# Altium PCB POW_PCB.PcbDoc
Units mm, origin at the board's own origin, x right, y up, seen from the top; angles counter-clockwise.
Board outline 100 x 100 mm, 2 copper layers (Top Layer, Bottom Layer), stack 1.67 mm thick; 55 components, 32 nets, 137 pads, 5 vias.
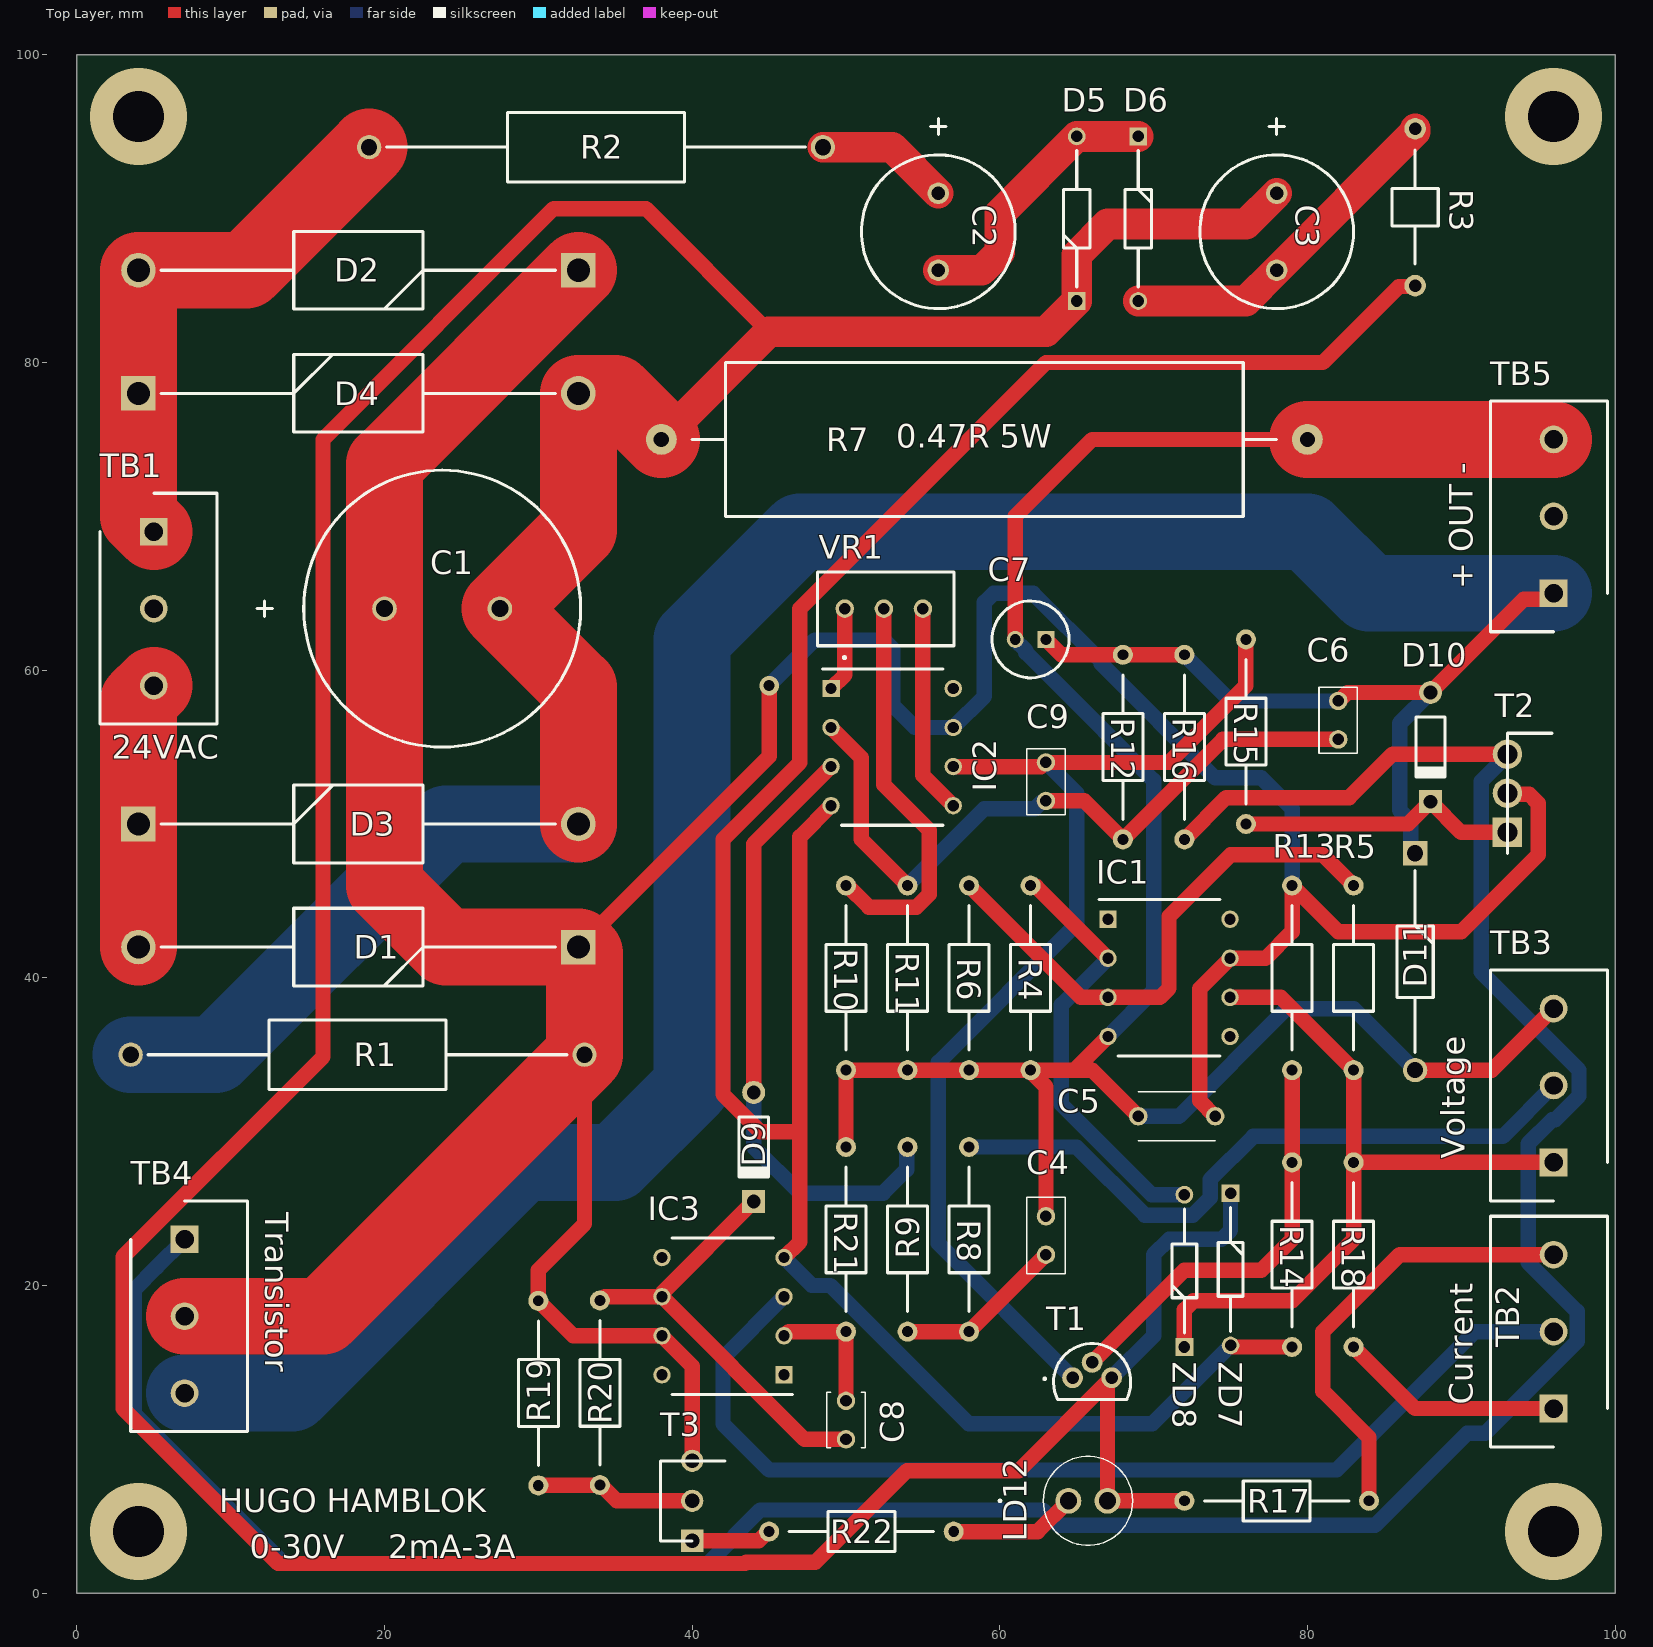
[diagram p0: Top Layer view]
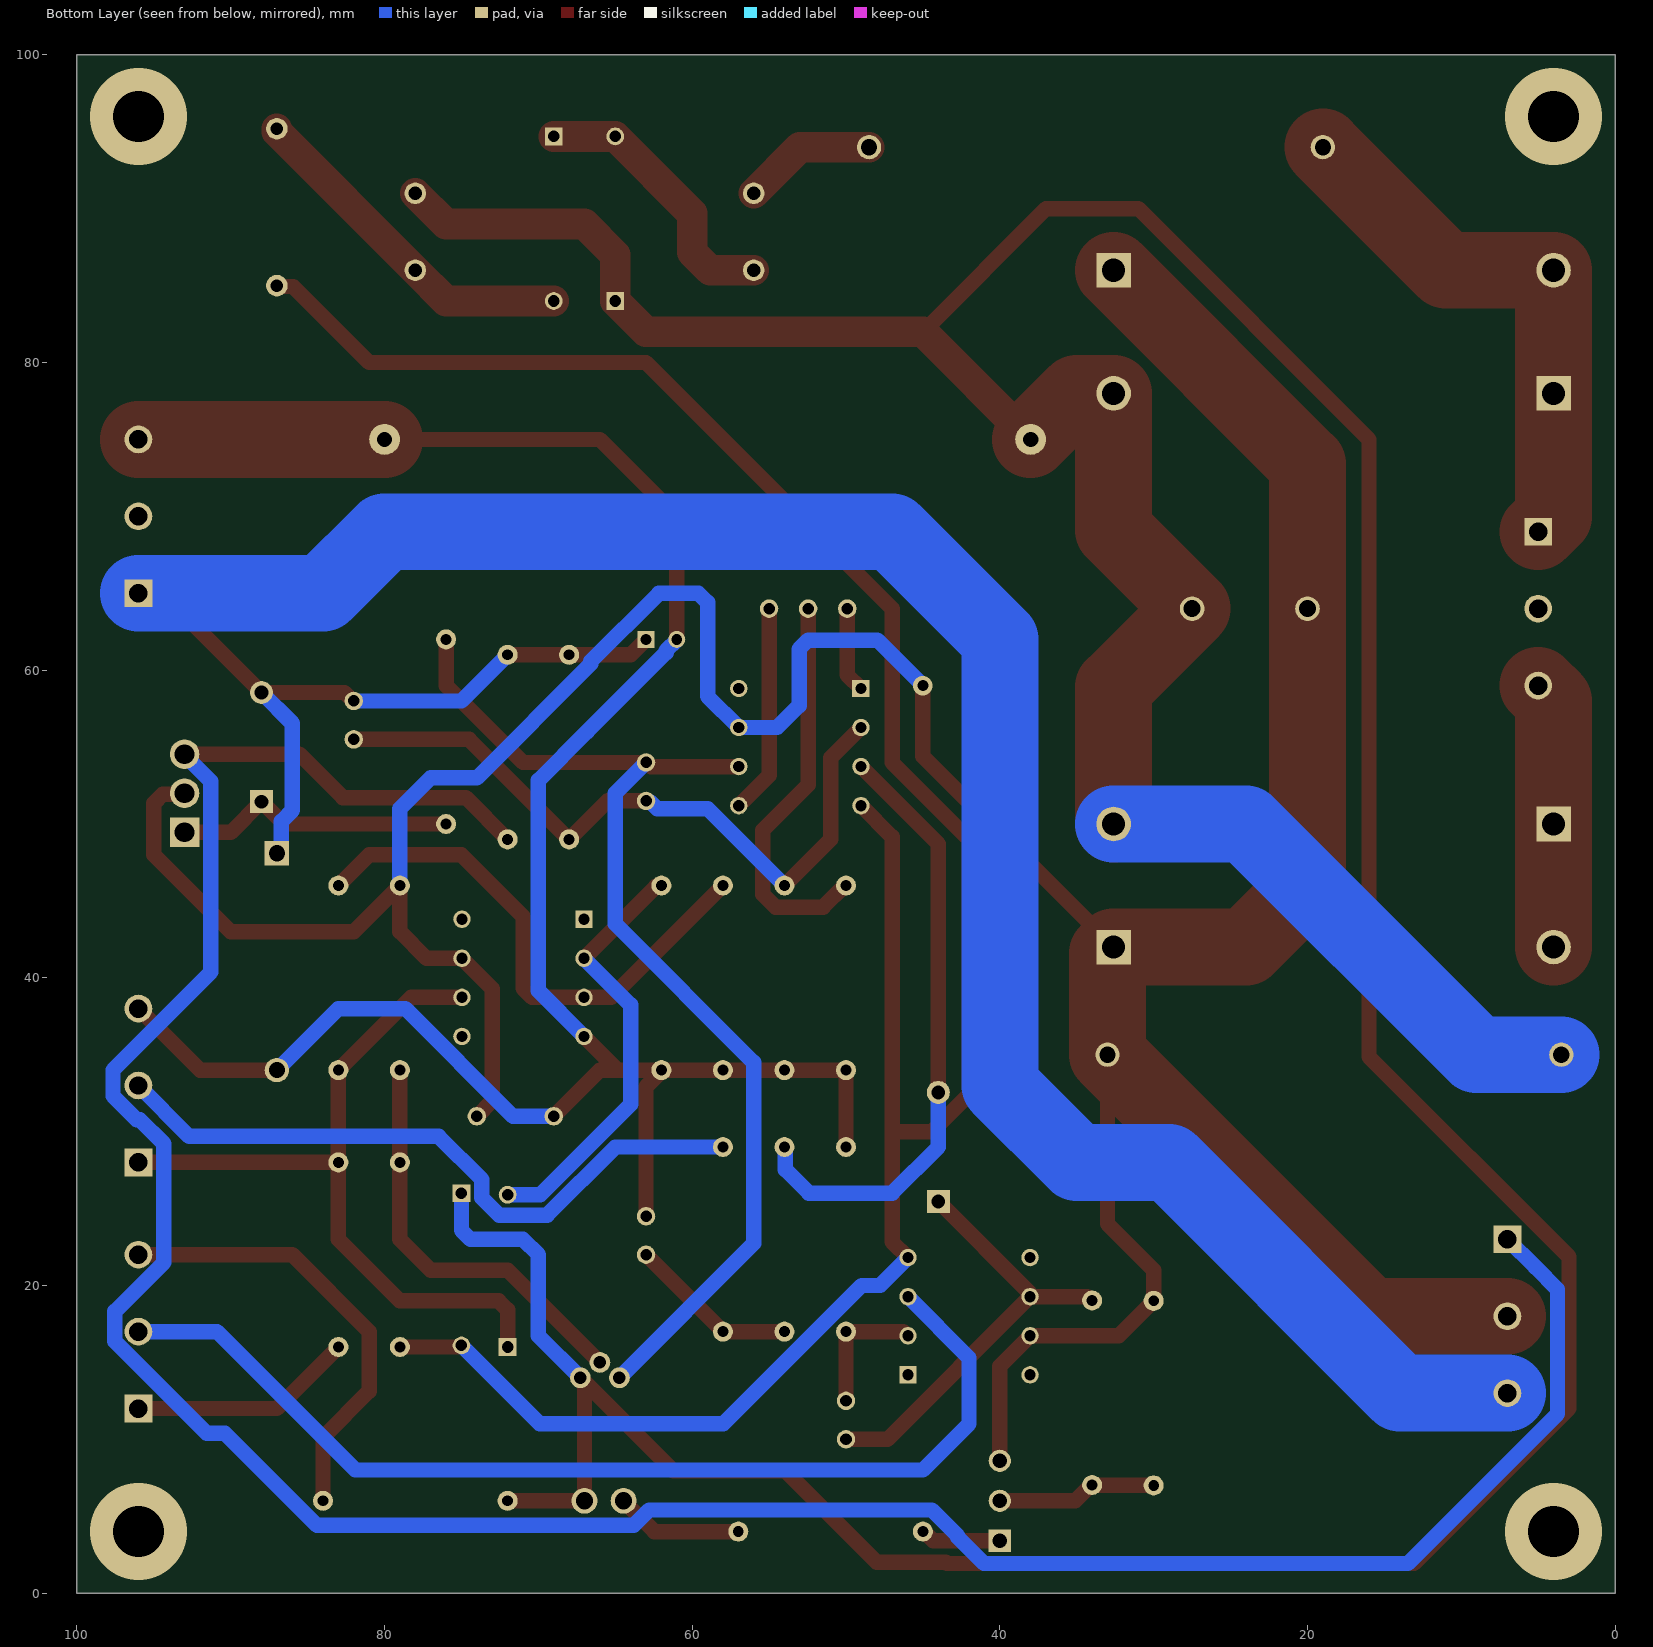
[diagram p1: Bottom Layer view, seen from below]
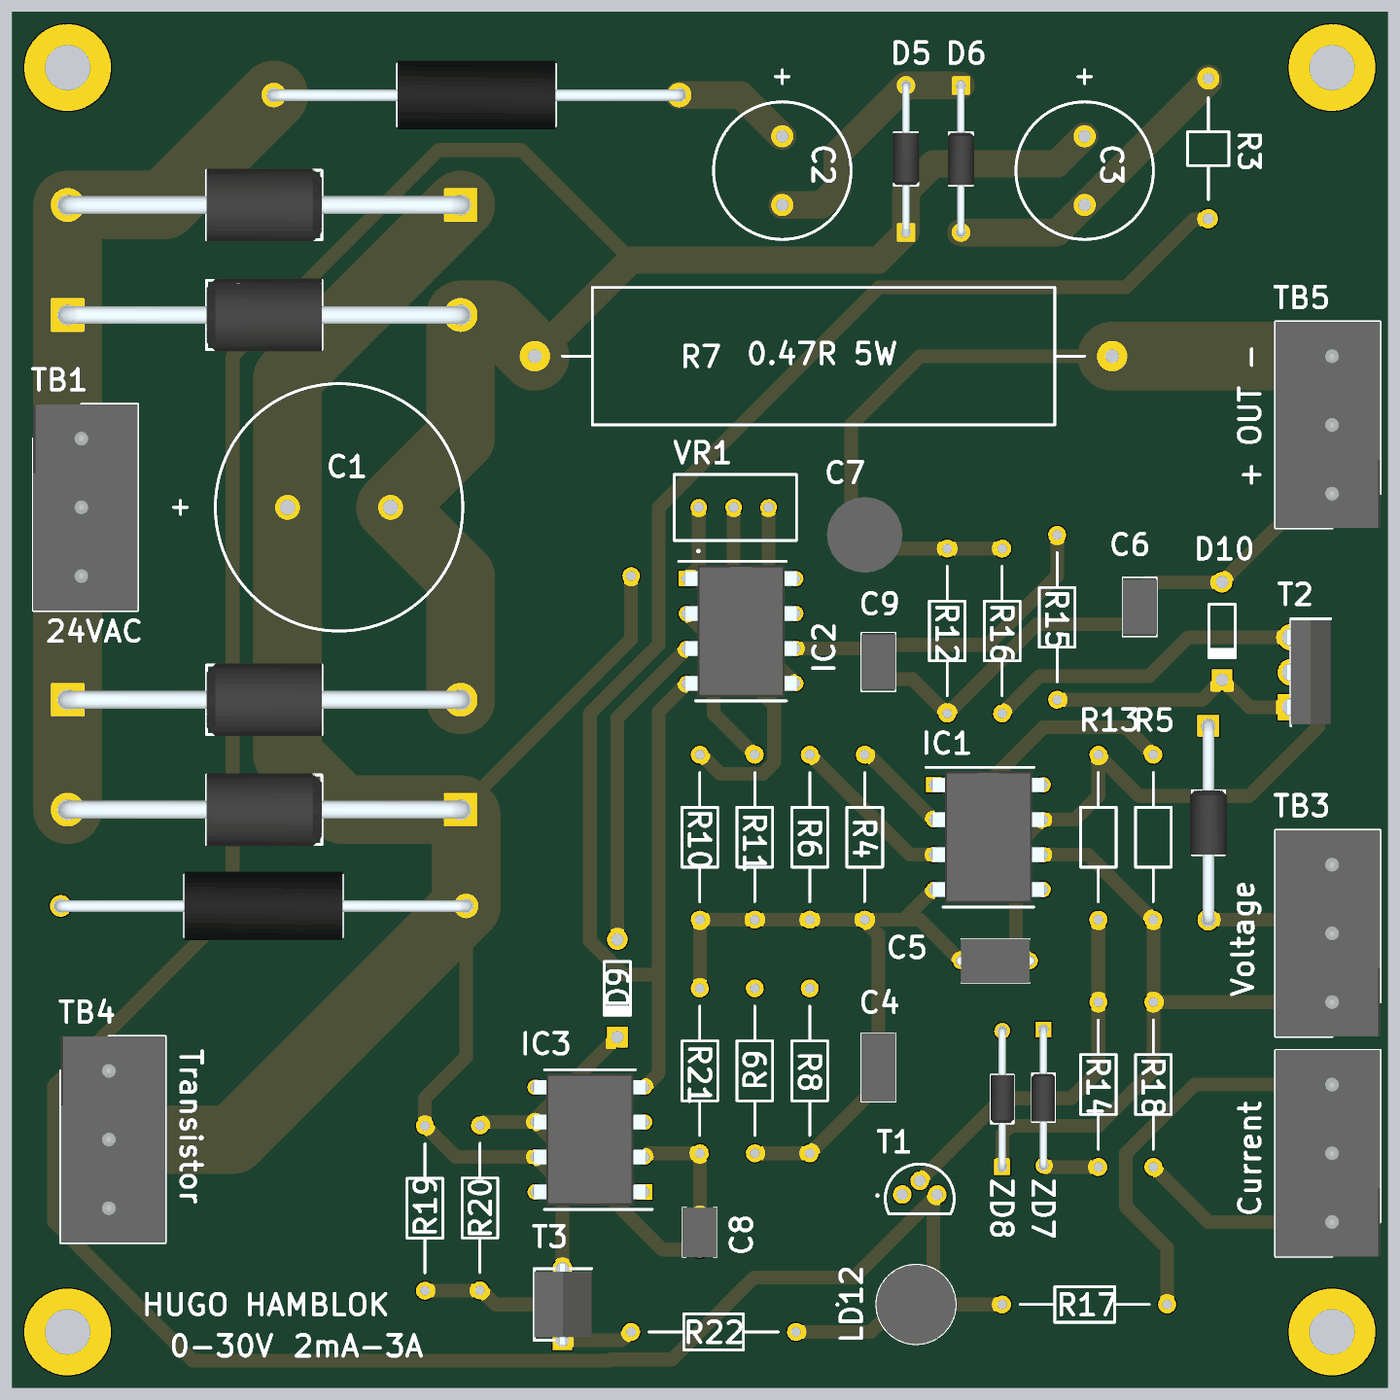
[diagram p2: 3D render of the assembled board from above, using the file's embedded part models]

## Layer stack, top to bottom
Top Solder: solder mask 0.0102, Solder Resist, Dk 3.5
Top Layer: signal copper 0.035
Dielectric 1: dielectric 1.6, FR-4, Dk 4.8
Bottom Layer: signal copper 0.035
Bottom Solder: solder mask 0.0102, Solder Resist, Dk 3.5

## Board outline
0,0 100,0 100,100 0,100

## Design rules (kind name [scope] priority, off if disabled: settings)
BoardOutlineClearance [All] p1: gap=0.2 ignorepadtopadclearanceinfootprint=FALSE
Clearance [All] p1: gap=0.127 ignorepadtopadclearanceinfootprint=FALSE
HoleSize [All] p1: absolutevalues=TRUE maxlimit=6.3 minlimit=0.2 maxpercent=80.000 minpercent=20.000
HoleToHoleClearance [All] p1: gap=0.127 allowstackedmicrovias=TRUE
MinimumSolderMaskSliver [All] p1: minsoldermaskwidth=0.127
PolygonConnect [All] p1: connectstyle=Relief reliefconductorwidth=0.254 reliefentries=4 polygonreliefangle="90 Angle" airgapwidth=0.254
RoutingVias [All] p1: holewidth=0.3 width=1 viastyle="Through Hole" minholewidth=0.3 minwidth=0.6 maxholewidth=0.3 maxwidth=1
SilkToSilkClearance [All] p1: silktosilkclearance=0.127
SolderMaskExpansion [All] p1: expansion=0.102 istentingtop=FALSE
Width [All] p1: maxlimit=5 minlimit=0.127 preferedwidth=2.5
26 further rules are at their usual default settings.

## Components (designator, comment, footprint, x,y, rotation, side; value= is the part's Value field where it differs from the comment)
C1 "860020681032" 860020681032 27.5,64 r180 top
C2 "870135775004" 870135775004 56,86 r90 top
C3 "870135775004" 870135775004 78,86 r90 top
C4 "RDER71H104K0S1H03A" RDE5C1H100J0P1H03B 63,22 r90 top
C5 "K224K20X7RF5TH5" K224K20X7RF5TH5 74,31 r180 top
C6 "RDE5C1H101J0K1H03B" RCE5C1H103J1A2H03B 82,55.5 r90 top
C7 "860020672010" CAPPRD200W52D500H1250 63,62 r180 top
C8 "RCE5C1H331J0M1H03A" RCE5C1H100J0A2H03B 50,10 r90 top
C9 "RDE5C1H101J0K1H03B" RCE5C1H103J1A2H03B 63,51.5 r90 top
D1 "1N5408G" DIOAD2860W130L840D505 32.6,42 r180 top
D2 "1N5408G" DIOAD2860W130L840D505 32.6,86 r180 top
D3 "1N5408G" DIOAD2860W130L840D505 4,50 r0 top
D4 "1N5408G" DIOAD2860W130L840D505 4,78 r0 top
D5 "1N4148TA" DIOAD1068W53L380D172 65,84 r90 top
D6 "1N4148TA" DIOAD1068W53L380D172 69,94.7 r270 top
D9 "Diode 1N4148" DO-35 44,29 r270 top
D10 "Diode 1N4148" DO-35 88,55 r270 top
D11 "1N4004RLG" DIOAD1405W86L465D235 87,48.1 r270 top
IC1 "TL081CP" DIP794W53P254L959H508Q8N 71,40 r0 top
IC2 "TL081CP" DIP794W53P254L959H508Q8N 53,55 r0 top
IC3 "TL081CP" DIP794W53P254L959H508Q8N 42,18 r180 top
LD12 "TLHR5400-AS12Z" TLHR5400AS12Z 64.46,6 r0 top
R1 "RSF100JB-73-2K2" "RSF100 Style Footprint" 33,35 r180 top
R2 "RSF100JB-73-82R" "RSF100 Style Footprint" 19,94 r0 top
R3 "MFP1-220RJI" MFP1-220RJI 87,95.2 r270 top
R4 "291-4.7K-RC" 291-XXX-RC-Type 62,34 r90 top
R5 "291-10K-RC" 291-XXX-RC-Type 83,46 r270 top
R6 "291-10K-RC" 291-XXX-RC-Type 58,34 r90 top
R7 "TUW5JR47E" TUW5JR47E 38,75 r0 top
R8 "291-27K-RC" 291-XXX-RC-Type 58,29 r270 top
R9 "291-2.2K-RC" 291-XXX-RC-Type 54,17 r90 top
R10 "291-270K-RC" 291-XXX-RC-Type 50,46 r270 top
R11 "291-27K-RC" 291-XXX-RC-Type 54,34 r90 top
R12 "291-56K-RC" 291-XXX-RC-Type 68,49 r90 top
R13 "291-10K-RC" 291-XXX-RC-Type 79,46 r270 top
R14 "291-1.5K-RC" 291-XXX-RC-Type 79,28 r270 top
R15 "291-1K-RC" 291-XXX-RC-Type 76,62 r270 top
R16 "291-1K-RC" 291-XXX-RC-Type 72,49 r90 top
R17 "291-33-RC" 291-XXX-RC-Type 84,6 r180 top
R18 "291-56K-RC" 291-XXX-RC-Type 83,28 r270 top
R19 "291-2.2K-RC" 291-XXX-RC-Type 30,19 r270 top
R20 "291-10K-RC" 291-XXX-RC-Type 34,7.025 r90 top
R21 "291-10K-RC" 291-XXX-RC-Type 50,17 r90 top
R22 "291-3.9K-RC" 291-XXX-RC-Type 45,4 r0 top
T1 "BC547BBU" SS9018HBU 66,14 r0 top
T2 "2SD882" TO254P290X760X1320-3P 93,49.46 r90 top
T3 "BC557BTA" TO260P419X476X877-3P 40,3.4 r90 top
TB1 "TB002-500-03BE" SHDR3W100P0X500_1X3_1500X760X1000P 5,69 r270 top
TB2 "TB002-500-03BE" SHDR3W100P0X500_1X3_1500X760X1000P 96,12 r90 top
TB3 "TB002-500-03BE" SHDR3W100P0X500_1X3_1500X760X1000P 96,28 r90 top
TB4 "TB002-500-03BE" SHDR3W100P0X500_1X3_1500X760X1000P 7,23 r270 top
TB5 "TB002-500-03BE" SHDR3W100P0X500_1X3_1500X760X1000P 96,65 r90 top
VR1 "PV36W104C01B00" PV36W 52.46,61.559 r270 top
ZD7 "1N5231B-TR" DIOAD990W55L350D160 75,26 r270 top
ZD8 "1N5231B-TR" DIOAD990W55L350D160 72,16 r90 top

## Footprints (in the part's own frame and the unit in brackets; to place one, negate y for a bottom-side part, rotate by r counter-clockwise, add the part's x,y. Pads: shape width x height; smd on the part's side, far side on the other; paste and mask are expansions set on the pad)
291-XXX-RC-Type [mm]
  round 1.3 hole 0.7: 1(0,0) 2(12,0)
  silkscreen extent 1.3,-1.3 10.7,1.3
860020681032 [mm]
  round 1.6 hole 1.1: 1(0,0) 2(7.5,0)
  silkscreen extent -5.25,-9 15.8,9
870135775004 [mm]
  round 1.4 hole 0.9: 1(0,0) 2(5,0)
  silkscreen extent -2.5,-5 9.85,5
CAPPRD200W52D500H1250 [mm]
  rect 1.1x1.1 hole 0.7: 1(0,0)
  round 1.1 hole 0.7: 2(2,0)
  silkscreen extent -1.5,-2.5 3.5,2.5, body extent -1.75,-2.75 3.75,2.75, height 12.5
DIOAD990W55L350D160 [mm]
  rect 1.15x1.15 hole 0.75: 1(0,0)
  round 1.15 hole 0.75: 2(9.9,0)
  silkscreen extent 0.92,-0.8 8.98,0.8, body extent -0.27,-0.85 10.18,0.85, height 1.69
DIOAD1068W53L380D172 [mm]
  rect 1.15x1.15 hole 0.75: 1(0,0)
  round 1.15 hole 0.75: 2(10.7,0)
  silkscreen extent 0.92,-0.86 9.77,0.86, body extent -0.26,-0.95 10.95,0.95, height 1.9
DIOAD1405W86L465D235 [mm]
  rect 1.575x1.575 hole 1.05: 1(0,0)
  round 1.575 hole 1.05: 2(14.1,0)
  silkscreen extent 1.14,-1.17 12.96,1.17, body extent -0.43,-1.35 14.48,1.35, height 2.69
DIOAD2860W130L840D505 [mm]
  rect 2.25x2.25 hole 1.5: 1(0,0)
  round 2.25 hole 1.5: 2(28.6,0)
  silkscreen extent 1.48,-2.52 27.13,2.52, body extent -0.64,-2.65 29.25,2.65, height 5.3
DIP794W53P254L959H508Q8N [mm]
  rect 1.13x1.13 hole 0.73: 1(-3.97,3.81)
  round 1.13 hole 0.73: 2(-3.97,1.27) 3(-3.97,-1.27) 4(-3.97,-3.81) 5(3.97,-3.81) 6(3.97,-1.27) 7(3.97,1.27) 8(3.97,3.81)
  silkscreen extent -4.53,-5.08 3.3,5.08, body extent -4.1,-4.79 4.1,4.79, height 5.08
DO-35 [mm] "Diode, Axial; Body 3.8 x 1.9 mm (LxDia. max), Lead Dia. 0.53 mm (max)"
  round 1.5 hole 0.9: 1(-3.55,0)
  rect 1.5x1.5 hole 0.9: 2(3.55,0)
  silkscreen extent -1.95,-0.95 2.05,0.95
K224K20X7RF5TH5 [mm]
  round 1.2 hole 0.75: 1(0,0) 2(5,0)
  silkscreen extent 0,-1.6 5,1.6, body extent -0.27,-1.6 5.28,1.6, height 5.1
MFP1-220RJI [mm]
  round 1.4 hole 0.8: 1(0,0) 2(10.2,0)
  silkscreen extent 1.4,-1.5 8.8,1.5
PV36W [mm]
  round 1.2 hole 0.74: 1(-2.441,-2.54) 2(-2.441,0) 3(-2.441,2.54)
  silkscreen extent -4.83,-4.32 0.81,4.57
RCE5C1H100J0A2H03B [mm]
  round 1.2 hole 0.75: 1(0,0) 2(2.5,0)
  silkscreen extent -0.55,-1.25 3.05,1.25, body extent -0.55,-1.25 3.05,1.25, height 5.1
RCE5C1H103J1A2H03B [mm]
  round 1.2 hole 0.75: 1(0,0) 2(2.5,0)
  silkscreen extent -0.9,-1.25 3.4,1.25, body extent -0.75,-1.25 3.25,1.25, height 5.1
RDE5C1H100J0P1H03B [mm]
  round 1.2 hole 0.75: 1(0,0) 2(2.5,0)
  silkscreen extent -1.25,-1.25 3.75,1.25, body extent -1.25,-1.25 3.75,1.25, height 6.1
"RSF100 Style Footprint" [mm]
  round 1.575 hole 1.05: 1(0,0) 2(29.5,0)
  silkscreen extent 1.14,-2.25 28.36,2.25, body extent -0.42,-2.5 29.92,2.5, height 5
SHDR3W100P0X500_1X3_1500X760X1000P [mm]
  rect 1.8x1.8 hole 1.2: 1(0,0)
  round 1.8 hole 1.2: 2(5,0) 3(10,0)
  silkscreen extent -2.5,-3.5 12.5,4.1, body extent -2.5,-3.5 12.5,4.1, height 10
SS9018HBU [mm]
  round 1.35 hole 0.82: 1(-1.27,0) 2(0,1) 3(1.27,0)
  silkscreen extent -3.14,-1.4 2.51,2.22
TLHR5400AS12Z [mm]
  round 1.68 hole 1.12: 1(0,0) 2(2.54,0)
  silkscreen extent -4.5,-2.9 4.17,2.9, body extent -1.63,-2.9 4.17,2.9, height 12.9
TO254P290X760X1320-3P [mm]
  rect 1.92x1.92 hole 1.28: 1(0,0)
  round 1.92 hole 1.28: 2(2.54,0) 3(5.08,0)
  silkscreen extent -1.36,-2.9 6.44,0, body extent -1.26,-2.9 6.34,0.26, height 12.92
TO260P419X476X877-3P [mm]
  rect 1.44x1.44 hole 0.96: 1(0,0)
  round 1.44 hole 0.96: 2(2.6,0) 3(5.2,0)
  silkscreen extent 0,-2.13 5.2,2.06, body extent -0.35,-2.13 5.55,2.06, height 7.82
TUW5JR47E [mm]
  round 2 hole 1: 1(0,0) 2(42,0)
  silkscreen extent 2,-5 40,5

## Part data
C1: "Capacitor 3300uF 50V"
C2 C3: "Capacitor 47uF 50V"
C4: "Capacitor", Manufacturer_Name="Murata Electronics", Mouser Part Number=81-RDER71H104K0S1H3A, Datasheet Link=https://psearch.en.murata.com/capacitor/product/RDER71H104K0S1H03A.html, Height=6mm, Manufacturer_Part_Number=RDER71H104K0S1H03A, Mouser Price/Stock=https://www.mouser.com/Search/Refine.aspx?Keyword=81-RDER71H104K0S1H3A
C5: "Capacitor", Manufacturer_Name=Vishay, Mouser Part Number=594-K224K20X7RF5TH5, RS Part Number=8523328, Allied Price/Stock=https://www.alliedelec.com/bccomponents-vishay-k224k20x7rf5th5/70122947/, Allied_Number=70122947, Datasheet Link=http://www.vishay.com/docs/45171/kseries.pdf, Height=5mm, Manufacturer_Part_Number=K224K20X7RF5TH5, Mouser Price/Stock=https://www.mouser.com/Search/Refine.aspx?Keyword=594-K224K20X7RF5TH5, RS Price/Stock=http://uk.rs-online.com/web/p/products/8523328
C6 C9: "Capacitor", Manufacturer_Name="Murata Electronics", Mouser Part Number=81-RDE5C1H101J0K1H3B, Datasheet Link=https://psearch.en.murata.com/capacitor/product/RDE5C1H101J0K1H03B.html, Height=5mm, Manufacturer_Part_Number=RDE5C1H101J0K1H03B, Mouser Price/Stock=https://www.mouser.com/Search/Refine.aspx?Keyword=81-RDE5C1H101J0K1H3B
C7: "Capacitor Polarised", Manufacturer_Name="Wurth Elektronik", Mouser Part Number=710-860020672010, RS Part Number=8396621P, Datasheet Link=https://katalog.we-online.de/pbs/datasheet/860020672010.pdf, Height=12.5mm, Manufacturer_Part_Number=860020672010, Mouser Price/Stock=https://www.mouser.com/Search/Refine.aspx?Keyword=710-860020672010, RS Price/Stock=http://uk.rs-online.com/web/p/products/8396621P
C8: "Capacitor", Manufacturer_Name="Murata Electronics", Datasheet Link=https://psearch.en.murata.com/capacitor/product/RCE5C1H331J0M1H03A.html, Height=5mm, Manufacturer_Part_Number=RCE5C1H331J0M1H03A
D1 D2 D3 D4: "Diode", Manufacturer_Name="ON Semiconductor", Mouser Part Number=863-1N5408G, RS Part Number=7743344P, Allied Price/Stock=http://www.alliedelec.com/on-semiconductor-1n5408g/70099678/, Allied_Number=70099678, Datasheet Link=http://www.onsemi.com/pub/Collateral/1N5400-D.PDF, Manufacturer_Part_Number=1N5408G, Mouser Price/Stock=https://www.mouser.com/Search/Refine.aspx?Keyword=863-1N5408G, RS Price/Stock=http://uk.rs-online.com/web/p/products/7743344P
D5 D6: "Diode", Manufacturer_Name="ON Semiconductor", Mouser Part Number=512-1N4148TA, RS Part Number=7390290P, Datasheet Link=https://www.fairchildsemi.com/datasheets/1N/1N914.pdf, Manufacturer_Part_Number=1N4148TA, Mouser Price/Stock=https://www.mouser.com/Search/Refine.aspx?Keyword=512-1N4148TA, RS Price/Stock=http://uk.rs-online.com/web/p/products/7390290P
D9 D10: "High Conductance Fast Diode", Code_JEDEC=DO-204-AH, ComponentLink1Description="Manufacturer Link", ComponentLink1URL=http://www.fairchildsemi.com/, ComponentLink2Description=Datasheet, ComponentLink2URL=http://www.fairchildsemi.com/ds/1N%2F1N4148.pdf, DatasheetVersion=1997, LatestRevisionDate=17-Jul-2002, LatestRevisionNote="Re-released for DXP Platform.", PackageDescription="Diode, Axial; Body 3.8 x 1.9 mm (LxDia. max), Lead Dia. 0.53 mm (max)", PackageReference=DO-35, Published=8-Jun-2000, Publisher="Altium Limited"
D11: "Diode", Manufacturer_Name="ON Semiconductor", Mouser Part Number=863-1N4004RLG, RS Part Number=1844627P, Datasheet Link=http://www.onsemi.com/pub/Collateral/1N4001-D.PDF, Manufacturer_Part_Number=1N4004RLG, Mouser Price/Stock=https://www.mouser.com/Search/Refine.aspx?Keyword=863-1N4004RLG, RS Price/Stock=http://uk.rs-online.com/web/p/products/1844627P
IC1 IC2 IC3: "Integrated Circuit", Manufacturer_Name="Texas Instruments", Mouser Part Number=595-TL081CP, RS Part Number=0304223P, Datasheet Link=http://www.ti.com/lit/ds/symlink/tl081a.pdf, Height=5.08mm, Manufacturer_Part_Number=TL081CP, Mouser Price/Stock=https://www.mouser.com/Search/Refine.aspx?Keyword=595-TL081CP, RS Price/Stock=http://uk.rs-online.com/web/p/products/0304223P
LD12: "LED", Manufacturer_Name=Vishay, Mouser Part Number=78-TLHR5400-AS12Z, Datasheet Link=http://www.vishay.com/docs/83012/tlhg540.pdf, Height=12.8mm, Manufacturer_Part_Number=TLHR5400-AS12Z, Mouser Price/Stock=https://www.mouser.com/Search/Refine.aspx?Keyword=78-TLHR5400-AS12Z
R1: "Resistor 1W 2.2K Ohm 5%", Manufacturer_Name="YAGEO (PHYCOMP)", Mouser Part Number=603-RSF100JB-73-2K2, Datasheet Link="https://www.mouser.com/datasheet/2/447/Yageo LR_RSF_2013-594715.pdf", Manufacturer_Part_Number=RSF100JB-73-2K2, Mouser Price/Stock=https://www.mouser.com/Search/Refine.aspx?Keyword=603-RSF100JB-73-2K2
R2: "Resistor 1W 82 Ohm 5%"
R3: "Resistor 220 ohm 5% 1W"
R7: "Resistor", Manufacturer_Name=Ohmite, Mouser Part Number=588-TUW5JR47E, RS Part Number=8934166, Allied Price/Stock=https://www.alliedelec.com/ohmite-tuw5jr47e/70024726/, Allied_Number=70024726, Datasheet Link=https://componentsearchengine.com/Datasheets/2/TUW5JR47E.pdf, Manufacturer_Part_Number=TUW5JR47E, Mouser Price/Stock=https://www.mouser.com/Search/Refine.aspx?Keyword=588-TUW5JR47E, RS Price/Stock=http://uk.rs-online.com/web/p/products/8934166
T1: "Transistor BJT NPN", Manufacturer_Name="ON Semiconductor", Mouser Part Number=512-BC547BBU, RS Part Number=8031083P, Datasheet Link=http://www.onsemi.com/pub/Collateral/BC550-D.pdf, Manufacturer_Part_Number=BC547BBU, Mouser Price/Stock=https://www.mouser.com/Search/Refine.aspx?Keyword=512-BC547BBU, RS Price/Stock=http://uk.rs-online.com/web/p/products/8031083P
T2: "Integrated Circuit", Manufacturer_Name=STMicroelectronics, Mouser Part Number=511-2SD882, RS Part Number=6868045P, Allied Price/Stock=http://www.alliedelec.com/stmicroelectronics-2sd882/70389765/, Allied_Number=70389765, Datasheet Link=http://www.st.com/web/en/resource/technical/document/datasheet/CD00062867.pdf, Height=2.9mm, Manufacturer_Part_Number=2SD882, Mouser Price/Stock=https://www.mouser.com/Search/Refine.aspx?Keyword=511-2SD882, RS Price/Stock=http://uk.rs-online.com/web/p/products/6868045P
T3: "Transistor BJT PNP", Manufacturer_Name="ON Semiconductor", Mouser Part Number=512-BC557BTA, RS Part Number=7613505P, Datasheet Link=https://componentsearchengine.com/Datasheets/2/BC557BTA.pdf, Height=4.19mm, Manufacturer_Part_Number=BC557BTA, Mouser Price/Stock=https://www.mouser.com/Search/Refine.aspx?Keyword=512-BC557BTA, RS Price/Stock=http://uk.rs-online.com/web/p/products/7613505P
TB1 TB2 TB3 TB4 TB5: "Connector", Manufacturer_Name="CUI Devices", Mouser Part Number=490-TB002-500-03BE, Datasheet Link=https://www.cuidevices.com/product/resource/tb002-500.pdf, Height=10mm, Manufacturer_Part_Number=TB002-500-03BE, Mouser Price/Stock=https://www.mouser.com/Search/Refine.aspx?Keyword=490-TB002-500-03BE
VR1: "Variable Resistor", Manufacturer_Name=Bourns, Mouser Part Number=81-PV36W104C01B00, RS Part Number=7692160P, Allied Price/Stock=https://www.alliedelec.com/bourns-pv36w104c01b00/71024705/, Allied_Number=71024705, Datasheet Link=https://www.bourns.com/docs/Product-Datasheets/pv36.pdf, Manufacturer_Part_Number=PV36W104C01B00, Mouser Price/Stock=https://www.mouser.com/Search/Refine.aspx?Keyword=81-PV36W104C01B00, RS Price/Stock=http://uk.rs-online.com/web/p/products/7692160P
ZD7 ZD8: "Zener Diode", Manufacturer_Name=Vishay, Mouser Part Number=78-1N5231B, RS Part Number=8115967P, Allied Price/Stock=https://www.alliedelec.com/vishay-smallsignal-optoproducts-ssp-1n5231b-tr/70061636/, Allied_Number=70061636, Datasheet Link=http://www.vishay.com/docs/85588/1n5221.pdf, Manufacturer_Part_Number=1N5231B-TR, Mouser Price/Stock=https://www.mouser.com/Search/Refine.aspx?Keyword=78-1N5231B, RS Price/Stock=http://uk.rs-online.com/web/p/products/8115967P

## Via types
v1: diameter 6.3, hole 3.3, Top Layer to Bottom Layer, 4 vias
v2: diameter 1.27, hole 0.711, Top Layer to Bottom Layer, 1 vias

## Nets (pads, with @x,y where several pads share a name; then routed paths per layer and width w, separated by ;. In a path a pad name is that pad's centre, name@x,y a point inside that pad or via, vN(x,y) a via of type N, cw(c..) or ccw(c..) an arc to the next point about the centre after c; other vN are vias at no path point)
NetC1_1: C1.1 C3.2 D3.2 D4.2 D5.1 LD12.2 R1.2 R7.1 R17.2 T1.3 ZD7.1 | length 333.2
  Top Layer w1: 45,82 37,90 31,90 16,75 16,34.866 3,21.866 3,12 13.074,1.926 43.447,1.926 43.521,2 48,2 53.967,7.967 61.237,7.967 T1.3 67.27,13.905 67,13.635 LD12.2 R17.2
  Top Layer w2: R7.1 45,82 63,82 D5.1 65,87 67,89 76,89 C3.2
  Top Layer w5: D3.2 32.6,58.9 C1.1 32.6,69.1 D4.2 35,78 R7.1
  Bottom Layer w1: T1.3 70,16.73 70,22 71,23 74.414,23 75,23.586 ZD7.1
  Bottom Layer w5: R1.2 9,35 24,50 D3.2
NetC1_2: C1.2 C5.1 D1.1 D2.1 IC1.7 IC2.7 IC3.7 R1.1 R13.1 R19.1 T2.2 T3.3 TB4.2 | length 259
  Top Layer w1: D1.1 45,54.4 v2(45,59) ; R1.1 33,24 30,21 R19.1 32.27,16.73 IC3.7 40,14.76 T3.3 ; C5.1 73,32 73,39.3 IC1.7 77.27,41.27 79,43 R13.1 82,43 90,43 95,48 95,51.349 94.414,51.935 93.065,51.935 T2.2
  Top Layer w5: TB4.2 16,18 R1.1 33,41.6 D1.1 24,42 20,46 C1.2 20,73.4 D2.1
  Bottom Layer w1: v2(45,59) 47.957,61.957 52.466,61.957 53.051,61.372 53.051,57.692 54.473,56.27 IC2.7 59,58.3 59,64.414 59.586,65 62.166,65 66.596,60.57 66.596,60.404 74,53 77,53 79,51 R13.1
NetC2_1: C2.1 D5.2 D6.1 | length 18.1
  Top Layer w2: C2.1 58.828,86 60,87.172 60,89.7 D5.2 D6.1
NetC2_2: C2.2 R2.2 | length 8.7
  Top Layer w2: R2.2 53,94 C2.2
NetC3_1: C3.1 D6.2 R3.1 | length 22.8
  Top Layer w2: D6.2 76,84 C3.1 87,95 R3.1
NetC4_1: C4.1 R8.2 R9.1 | length 11.1
  Top Layer w1: R9.1 R8.2 C4.1
NetC4_2: C4.2 C5.2 C7.2 D11.2 IC1.4 R4.1 R6.1 R7.2 R10.2 R11.1 R21.2 TB3.3 TB5.3 | length 147.3
  Top Layer w1: R21.2 R10.2 R11.1 R6.1 R4.1 ; C7.2 61,70 66,75 R7.2 ; C4.2 63,32.919 62,33.919 R4.1 ; IC1.4 64.84,34 ; C5.2 66,34 64.84,34 ; D11.2 92,34 TB3.3 ; R4.1 64.84,34
  Top Layer w5: R7.2 TB5.3
  Bottom Layer w1: C7.2 61,61.973 61.696,61.277 61.696,61.138 66.834,56 70,52.834 70,39.16 IC1.4 ; C5.2 71.645,31 78.645,38 83,38 D11.2
NetC6_1: C6.1 C9.1 IC2.2 R11.2 R12.1 | length 46.3
  Top Layer w1: IC2.2 51,54.3 51,49 R11.2 ; C9.1 65.5,51.5 R12.1 74.5,55.5 C6.1
  Bottom Layer w1: R11.2 56.76,48.76 59,51 62.281,51 62.743,51.462 62.962,51.462 C9.1
NetC6_2: C6.2 C7.1 D10.1 D11.1 R12.2 R16.2 TB4.3 TB5.1 | length 180.1
  Top Layer w1: C7.1 64,61 R12.2 R16.2 ; C6.2 82.054,58 82.604,58.55 D10.1 94.05,64.6 95.6,64.6 TB5.1
  Bottom Layer w1: R16.2 75,58 C6.2 ; D11.1 86.713,48.388 86.713,50.171 86,50.884 86,56.55 D10.1
  Bottom Layer w5: TB4.3 14,13 29,28 35,28 40,33 40,62 47,69 80,69 84,65 TB5.1
NetC8_1: C8.1 D9.2 IC3.6 R20.2 | length 28.6
  Top Layer w1: R20.2 34.081,19.025 34.326,19.27 IC3.6 ; D9.2 38.055,19.505 38.055,19.295 IC3.6 ; C8.1 47.3,10 IC3.6
NetC8_2: C8.2 IC3.2 R21.1 | length 8.6
  Top Layer w1: IC3.2 46.005,16.73 46.275,17 R21.1 C8.2
NetC9_2: C9.2 IC2.6 R15.1 T1.1 | length 72.4
  Top Layer w1: IC2.6 62.676,53.73 62.946,54 C9.2 71,54 76,59 R15.1
  Bottom Layer w1: C9.2 65,52 65,43.5 56,34.5 56,22.73 T1.1
NetD1_2: D1.2 D3.1 TB1.3 | length 17.4
  Top Layer w5: D1.2 D3.1 4,58 TB1.3
NetD2_2: D2.2 D4.1 R2.1 TB1.1 | length 35.7
  Top Layer w5: TB1.1 4,70 D4.1 D2.2 11,86 R2.1
NetD9_1: D9.1 IC2.3 R9.2 | length 40.1
  Top Layer w1: D9.1 44,48.7 IC2.3
  Bottom Layer w1: D9.1 44,29 47,26 52.414,26 53.943,27.528 53.943,28.943 R9.2
NetD10_2: D10.2 R15.2 T2.1 | length 18.4
  Top Layer w1: R15.2 86.55,50 D10.2 89.99,49.46 T2.1
NetIC1_2: IC1.2 R4.2 ZD8.2 | length 28.2
  Top Layer w1: R4.2 62.057,45.943 62.357,45.943 IC1.2
  Bottom Layer w1: IC1.2 64,38.24 64,31.773 69.873,25.9 ZD8.2
NetIC1_3: IC1.3 R5.1 R6.2 | length 35.4
  Top Layer w1: R6.2 65.27,38.73 70.414,38.73 71,39.316 71,44 75,48 81,48 R5.1
NetIC1_6: IC1.6 R5.2 R18.1 TB3.1 ZD8.1 | length 49.3
  Top Layer w1: ZD8.1 72,18.414 72.586,19 79,19 83,23 R18.1 ; IC1.6 78.27,38.73 R5.2 R18.1 ; TB3.1 R18.1
NetIC2_4: IC2.4 IC3.4 R3.2 R14.2 ZD7.2 | length 158.7
  Top Layer w1: IC3.4 47,22.84 47,30 ; IC2.4 47,49.16 47,30 ; ZD7.2 75.041,16.1 75.141,16 R14.2 ; R3.2 86.944,84.944 85.944,84.944 81,80 63,80 47,64 47,54 42,49 42,32.423 44.423,30 47,30
  Bottom Layer w1: IC3.4 47.78,20 48.986,20 52.651,16.334 57.986,11 69.9,11 ZD7.2
NetIC3_3: IC3.3 TB2.2 | length 68.9
  Bottom Layer w1: IC3.3 42,15.3 42,11 45,8 81.892,8 90.892,17 TB2.2
NetLD12_1: LD12.1 R22.2 | length 8.3
  Top Layer w1: R22.2 62.46,4 LD12.1
NetR10_1: R10.1 VR1.2 | length 26.1
  Top Layer w1: R10.1 50.081,46 51.485,44.596 54.582,44.596 55.404,45.418 55.404,49.596 52.46,52.54 VR1.2
NetR13_2: R13.2 R14.1 T1.2 | length 27.3
  Top Layer w1: T1.2 72,21 77,21 79,23 R14.1 R13.2
NetR16_1: R16.1 T2.3 TB4.1 | length 185
  Top Layer w1: R16.1 74.711,51.711 82.711,51.711 85.54,54.54 T2.3
  Bottom Layer w1: TB4.1 5.186,21.186 3.746,19.746 3.746,11.652 13.472,1.926 41.032,1.926 42.725,3.619 42.725,3.711 44.418,5.404 62.802,5.404 63.8,4.406 84.392,4.406 90.372,10.387 91.546,10.387 97.527,16.367 97.527,18.313 94.346,21.494 94.346,29.212 95.897,30.764 96.103,30.764 97.654,32.315 97.654,34.007 91.286,40.375 91.286,52.775 93,54.489 T2.3
NetR17_1: R17.1 TB2.3 | length 29.3
  Top Layer w1: R17.1 84,10.129 81,13.129 81,17 86,22 TB2.3
NetR18_2: R18.2 TB2.1 | length 14.7
  Top Layer w1: R18.2 87,12 TB2.1
NetR19_2: R19.2 R20.1 T3.2 | length 10.4
  Top Layer w1: R19.2@30.013,7.012 33.987,7.012 R20.1 34.081,7.025 35.106,6 T3.2 ; 39,6 39.013,6.013
NetR22_1: R22.1 T3.1 | length 5.2
  Top Layer w1: T3.1 44.319,3.4 44.919,4 R22.1
P1-12: R8.1 TB3.2 | length 44
  Bottom Layer w1: R8.1 65,29 69.429,24.571 72.55,24.571 73.671,25.692 73.671,26.887 76.48,29.696 92.696,29.696 TB3.2
U2-P1: IC2.1 VR1.1 | length 5.6
  Top Layer w1: IC2.1 49.92,59.7 VR1.1
U2-P5: IC2.5 VR1.3 | length 13.6
  Top Layer w1: VR1.3 55,53.16 IC2.5
pads on no net: IC1.1 IC1.5 IC1.8 IC2.8 IC3.1 IC3.5 IC3.8 TB1.2 TB5.2
copper on no net:
  other v1: 4,4 96,4 4,96 96,96

## Silkscreen, mask and mechanical layers (free items; w line width, h text height)
Top Overlay:
  text "+ OUT -" at 90.746,65.254 h1.52 r90
  text "24VAC" at 2.254,54.254 h1.52
  text "Voltage" at 90.238,28.254 h1.52 r90
  text "Transistor" at 12.254,24.746 h1.52 r270
  text "Current" at 90.746,12.254 h1.52 r90
  text "HUGO HAMBLOK" at 9.254,5.254 h1.52
  text "0-30V" at 11.254,2.254 h1.52
  text "2mA-3A" at 20.254,2.254 h1.52
Board Outline:
  the board outline again, w0.1

## Text inside footprints (layer, text, board x,y; h text height)
R7: Top Overlay "0.47R 5W" at 53.254,74.454 h1.52